# Altium PCB PCB_assembly_drawing_try2.PcbDoc (part 1 of 5)
Units mm, origin at the board's own origin, x right, y up, seen from the top; angles counter-clockwise.
Board outline 187.5 x 240 mm, 2 copper layers (Top Layer, Bottom Layer), stack 2.8 mm thick; 485 components, 419 nets, 1569 pads, 683 vias.
Unrouted connection lines stored in the file: 11.
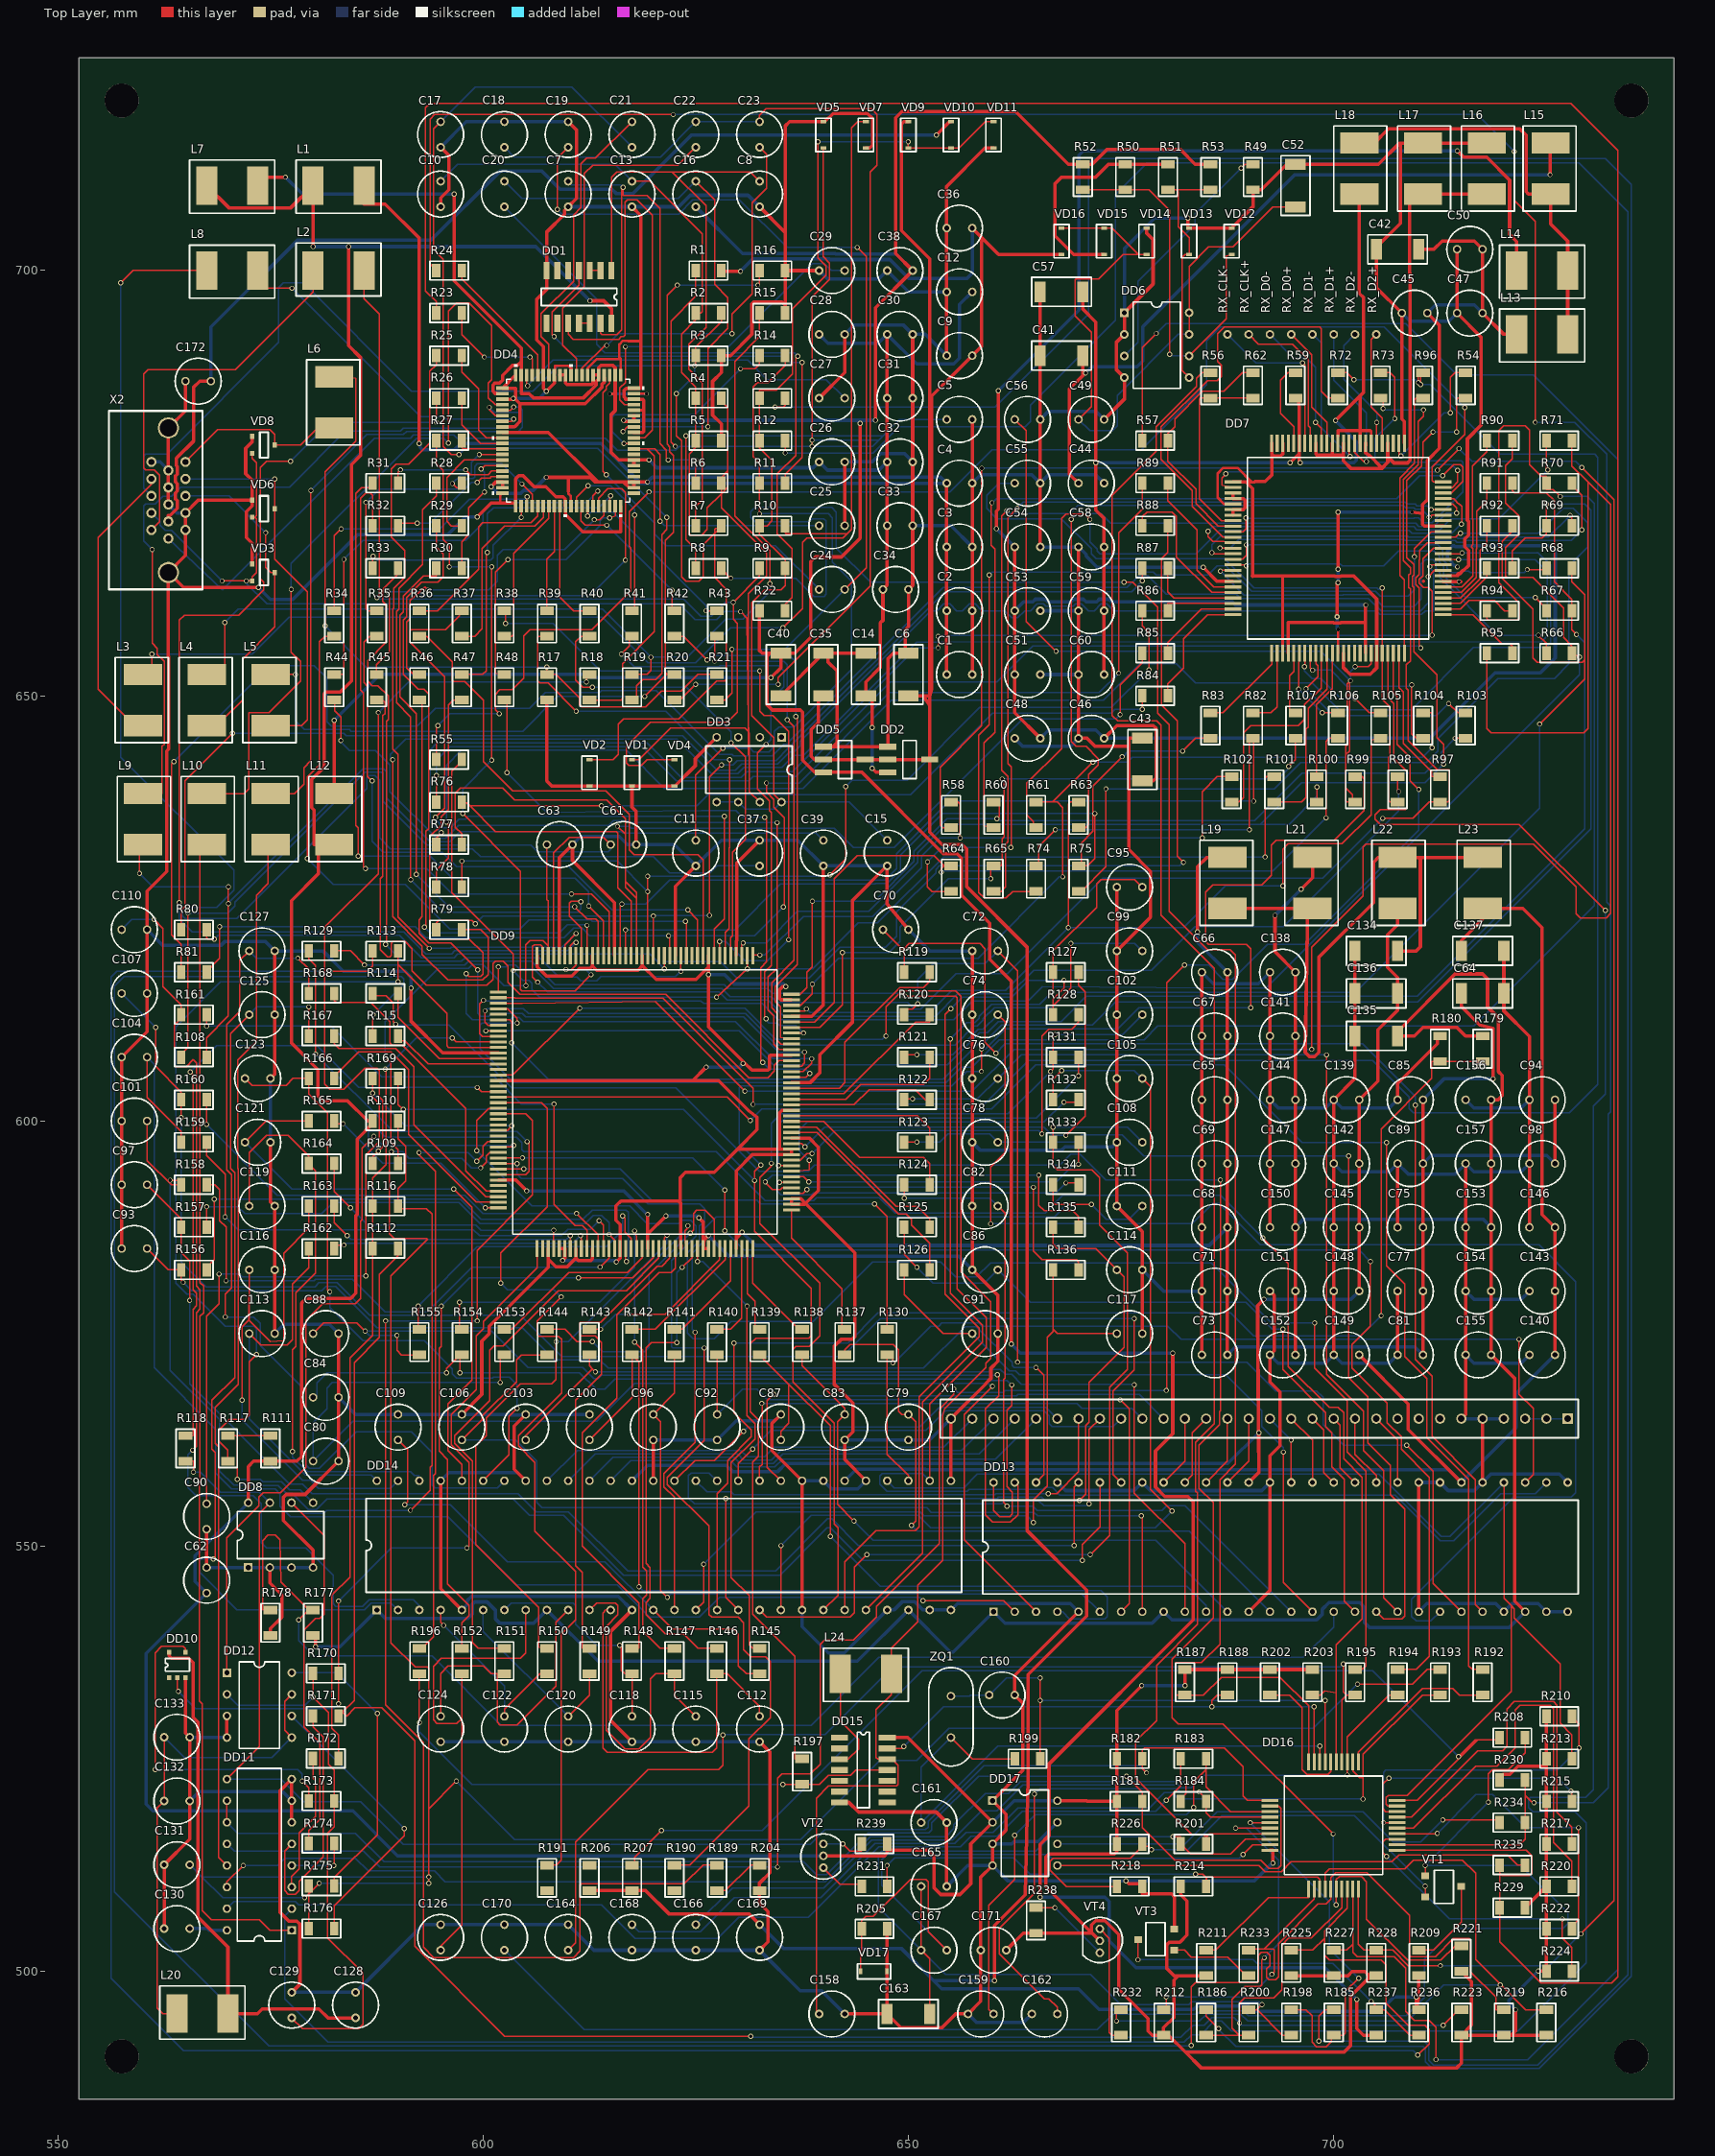
[diagram p0: Top Layer view]
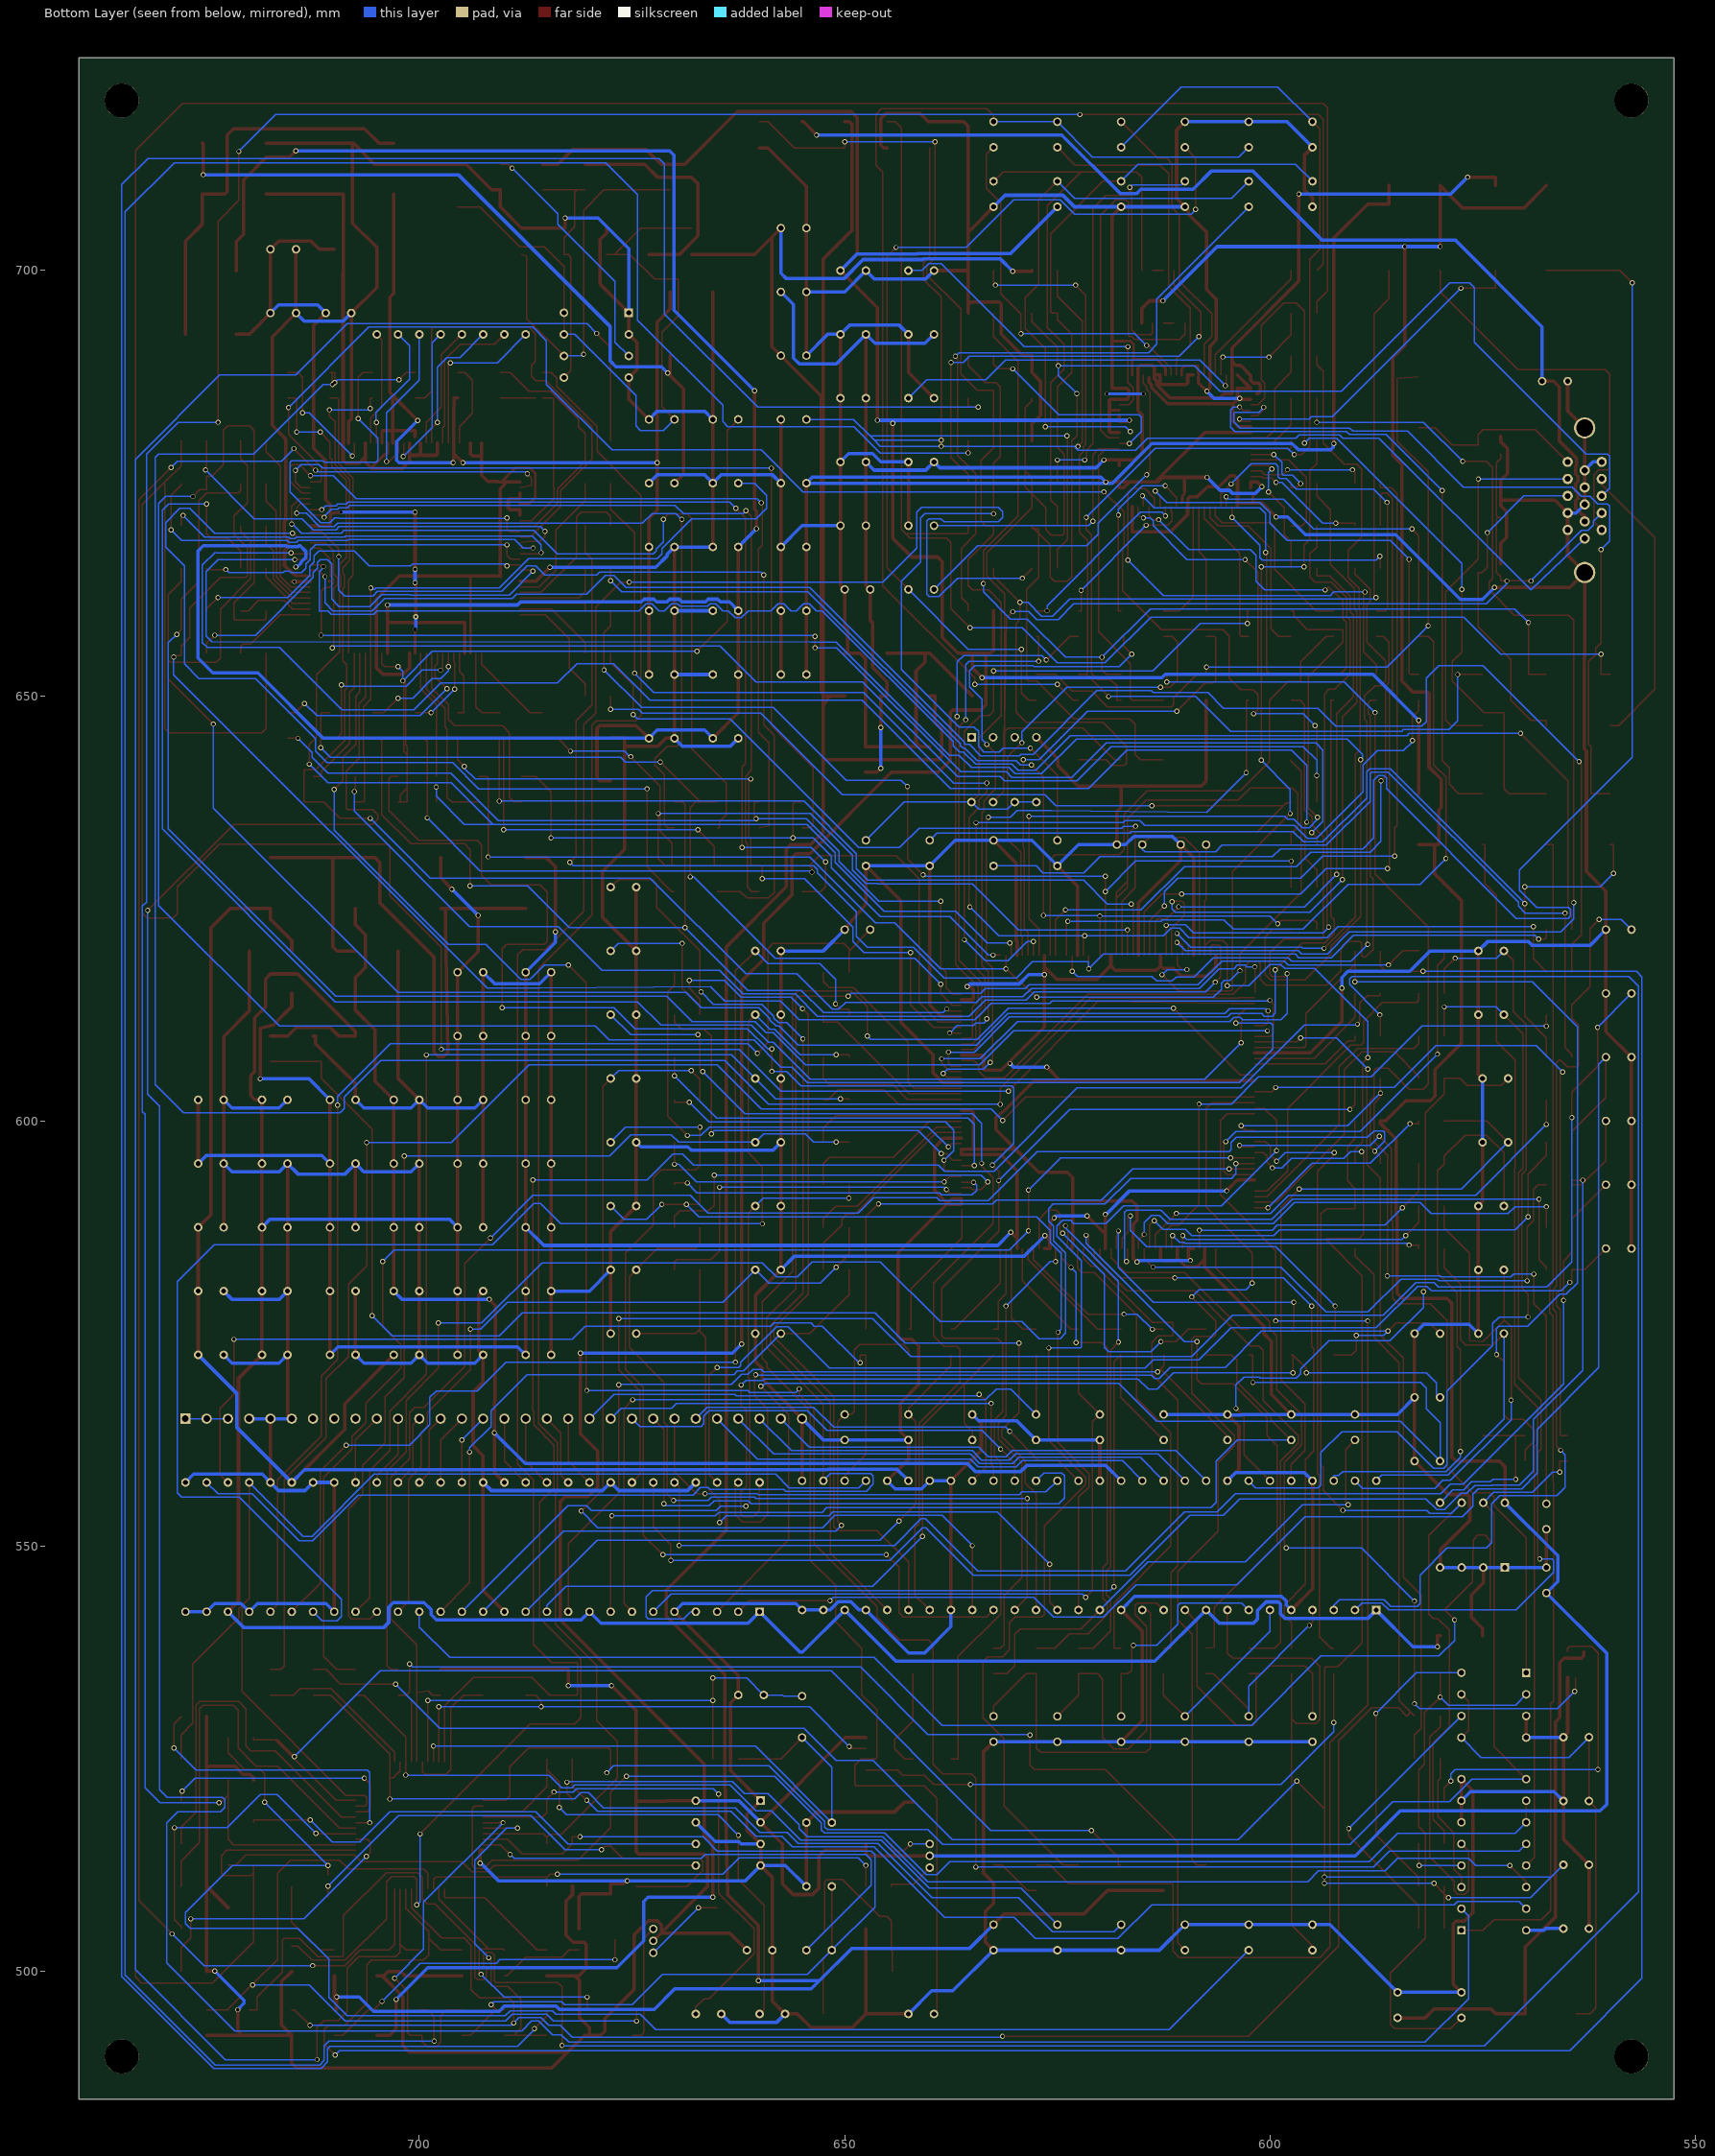
[diagram p1: Bottom Layer view, seen from below]

## Layer stack, top to bottom
Top Solder: solder mask 0.1, Solder Resist, Dk 3.5
Top Layer: signal copper 0.15
Dielectric 1: dielectric 2.5, FR-4, Dk 4.8
Bottom Layer: signal copper 0.15
Bottom Solder: solder mask 0.1, Solder Resist, Dk 3.5

## Board outline
552.5,485 740,485 740,725 552.5,725

## Design rules (kind name [scope] priority, off if disabled: settings)
Clearance [All] p1: gap=0.254 ignorepadtopadclearanceinfootprint=FALSE except(0: Arc-Hole Track-Hole SMDPad-Hole THPad-Hole Via-Hole Fill-Hole Poly-Hole Region-Hole Text-Hole; 0.2: Arc-SMDPad Track-SMDPad SMDPad-SMDPad)
PolygonConnect [All] p1: connectstyle=Relief reliefconductorwidth=0.254 reliefentries=4 polygonreliefangle="90 Angle" airgapwidth=0.254
RoutingVias [All] p1: holewidth=0.4 width=0.6 viastyle="Through Hole" minholewidth=0.3 minwidth=0.6 maxholewidth=0.5 maxwidth=1
SolderMaskExpansion [All] p1: expansion=0.102
Width signal [InNetClass('signal')] p1: maxlimit=0.25 minlimit=0.15 preferedwidth=0.15 minimp=50.000000 maximp=50.000000 favimp=50.000000
Width power [InNetClass('power')] p2: maxlimit=0.6 minlimit=0.3 preferedwidth=0.4 minimp=50.000000 maximp=50.000000 favimp=50.000000
30 further rules are at their usual default settings.

## Classes and differential pairs
net class signal: 12MHZ 9883_HS 9883_VS ADC1 ADC2 ASIC_H ASIC_RESET ASIC_SCL ASIC_SDA AUDIO_EN AUDIO_MUTE B_IN B_INA0 B_INA1 B_INA2 B_INA3 B_INA4 B_INA5 B_INA6 B_INA7 B_INB0 B_INB1 B_INB2 B_INB3 B_INB4 B_INB5 B_INB6 B_INB7 BA0 BA1 BA2 BA3 BA4 BA5 BA6 BA7 BB0 BB1 BB2 BB3 BB4 BB5 BB6 BB7 BL_ON_OFF COAST DE_IN FBLK FCLK1 G_IN G_INA0 G_INA1 G_INA2 G_INA3 G_INA4 G_INA5 G_INA6 G_INA7 G_INB0 G_INB1 G_INB2 G_INB3 G_INB4 G_INB5 G_INB6 G_INB7 GA0 GA1 GA2 GA3 GA4 GA5 GA6 GA7 GB0 GB1 GB2 GB3 GB4 GB5 GB6 GB7 HP_SENSE HSYNC_D HSYNC_IN HSYNC_X INPUT_SELECT LCD_CLK LCD_DE LCD_VCC LVDS_PD MCU_H_IN MCU_ISP_SCL MCU_ISP_SDA MCU_SCL1 MCU_SDA1 MCU_V_IN NetC7_1 NetC8_1 NetC11_1 NetC15_1 NetC16_1 NetC17_1 NetC18_1 NetC19_1 NetC20_2 NetC21_1 NetC22_1 NetC23_1 NetC24_1 NetC27_2 NetC29_2 NetC49_2 NetC55_2 NetC56_2 NetC61_2 NetC63_2 NetC90_2 NetC129_1 NetC132_1 NetC159_2 NetC160_1 NetC161_1 NetC162_2 NetC163_1 NetC164_1 NetC166_1 NetC167_1 NetC168_1 NetC170_1 NetDD1_2 NetDD1_4 NetDD1_11 NetDD4_2 NetDD4_3 NetDD4_4 NetDD4_5 NetDD4_6 NetDD4_7 NetDD4_8 NetDD4_9 NetDD4_12 NetDD4_13 NetDD4_14 NetDD4_15 NetDD4_16 NetDD4_17 NetDD4_18 NetDD4_19 NetDD4_56 NetDD4_57 NetDD4_64 NetDD4_65 NetDD4_66 NetDD4_67 NetDD4_70 NetDD4_71 NetDD4_72 NetDD4_73 NetDD4_74 NetDD4_75 NetDD4_76 NetDD4_77 NetDD6_3 NetDD6_5 NetDD6_6 NetDD7_8 NetDD7_9 NetDD7_10 NetDD7_11 NetDD7_12 NetDD7_13 NetDD7_14 NetDD7_15 NetDD7_16 NetDD7_17 NetDD7_20 NetDD7_21 NetDD7_22 NetDD7_23 NetDD7_24 NetDD7_25 NetDD7_26 NetDD7_27 NetDD7_30 NetDD7_31 NetDD7_32 NetDD7_33 NetDD7_34 NetDD7_35 NetDD7_36 NetDD7_37 NetDD7_49 NetDD7_50 NetDD7_51 NetDD7_52 NetDD7_53 NetDD7_54 NetDD7_55 NetDD7_56 NetDD7_59 NetDD7_60 NetDD7_61 NetDD7_62 NetDD7_63 NetDD7_64 NetDD7_65 NetDD7_66 NetDD7_69 NetDD7_70 NetDD7_71 NetDD7_72 NetDD7_73 NetDD7_74 NetDD7_75 NetDD7_77 NetDD7_80 NetDD7_81 NetDD7_85 NetDD7_86 NetDD7_90 NetDD7_91 NetDD7_93 NetDD7_94 NetDD7_96 NetDD8_5 NetDD9_11 NetDD9_13 NetDD9_14 NetDD9_19 NetDD9_33 NetDD9_34 NetDD9_37 NetDD9_38 NetDD9_39 NetDD9_40 NetDD9_44 NetDD9_47 NetDD9_49 NetDD9_50 NetDD9_52 NetDD9_53 NetDD9_54 NetDD9_55 NetDD9_57 NetDD9_58 NetDD9_59 NetDD9_60 NetDD9_62 NetDD9_63 NetDD9_64 NetDD9_65 NetDD9_66 NetDD9_68 NetDD9_69 NetDD9_70 NetDD9_73 NetDD9_74 NetDD9_75 NetDD9_76 NetDD9_78 NetDD9_79 NetDD9_80 NetDD9_81 NetDD9_84 NetDD9_85 NetDD9_86 NetDD9_87 NetDD9_88 NetDD9_89 NetDD9_90 NetDD9_93 NetDD9_95 NetDD9_96 NetDD9_97 NetDD9_98 NetDD9_100 NetDD9_101 NetDD9_102 NetDD9_103 NetDD10_4 NetDD11_3 NetDD11_4 NetDD11_5 NetDD12_6 NetDD12_8 NetDD13_17 NetDD13_37 NetDD13_38 NetDD13_39 NetDD13_40 NetDD13_41 NetDD13_42 NetDD13_45 NetDD13_46 NetDD13_47 NetDD13_48 NetDD14_17 NetDD14_37 NetDD14_38 NetDD14_39 NetDD14_40 NetDD14_41 NetDD14_42 NetDD14_45 NetDD14_46 NetDD14_47 NetDD14_48 NetDD15_3 NetDD15_11 NetDD15_13 NetDD16_1 NetDD16_6 NetDD16_15 NetDD16_16 NetDD16_23 NetDD16_24 NetDD16_40 NetDD16_42 NetDD16_43 NetDD16_44 NetDD17_5 NetDD17_6 NetL2_2 NetL3_2 NetL4_2 NetL5_2 NetL6_2 NetR209_2 NetR218_2 NetR231_2 NetR232_2 NetR233_2 NetR236_1 NetR238_1 NetR239_1 OSD_B OSD_CLK OSD_G OSD_HS OSD_R OSD_VS PD PDO POWER_ON_OFF PSC0 PSC1 R_IN R_INA0 R_INA1 R_INA2 R_INA3 R_INA4 R_INA5 R_INA6 R_INA7 R_INB0 R_INB1 R_INB2 R_INB3 R_INB4 R_INB5 R_INB6 R_INB7 RA0 RA1 RA2 RA3 RA4 RA5 RA6 RA7 RB0 RB1 RB2 RB3 RB4 RB5 RB6 RB7 ROM_SCL ROM_SCL_ASIC ROM_SCL_EEPROM ROM_SDA SCDT VCLK00 VCLK01 VGA_CON VGA_CONN VGA_HS VGA_SCL VGA_SDA VGA_VS VLCK00 VSYNC_D VSYNC_IN VSYNC_MCU
net class power: 3_3Va 3V3 3V3b 3V3LVDSA 3V3LVDSD 3V3LVDSP 3V3SD 5V_DDC 5V_STBY 5V_VGA 5Va 5Vb +3V3 A3_3V A3V3 D3_3V D3_V3 GND O3_3V P3_3V P3V3 PKA_GND
net class R_INB[0..7]: R_INB0 R_INB1 R_INB2 R_INB3 R_INB4 R_INB5 R_INB6 R_INB7
net class R_INA[0..7]: R_INA0 R_INA1 R_INA2 R_INA3 R_INA4 R_INA5 R_INA6 R_INA7
net class G_INB[0..7]: G_INB0 G_INB1 G_INB2 G_INB3 G_INB4 G_INB5 G_INB6 G_INB7
net class G_INA[0..7]: G_INA0 G_INA1 G_INA2 G_INA3 G_INA4 G_INA5 G_INA6 G_INA7
net class B_INB[0..7]: B_INB0 B_INB1 B_INB2 B_INB3 B_INB4 B_INB5 B_INB6 B_INB7
net class B_INA[0..7]: B_INA0 B_INA1 B_INA2 B_INA3 B_INA4 B_INA5 B_INA6 B_INA7
component class VGA: C172 X2
component class 36: C158 C159 C160 C161 C162 C163 C164 C165 C166 C167 C168 C169 C170 C171 DD15 DD16 DD17 L24 R181 R182 R183 R184 R185 R186 R187 R188 R189 R190 R191 R192 R193 R194 R195 R196 R197 R198 R199 R200 R201 R202 R203 R204 R205 R206 R207 R208 R209 R210 R211 R212 R213 R214 R215 R216 R217 R218 R219 R220 R221 R222 R223 R224 R225 R226 R227 R228 R229 R230 R231 R232 R233 R234 R235 R236 R237 R238 R239 VD17 VT1 VT2 VT3 VT4 ZQ1
component class 35: C134 C135 C136 C137 C138 C139 C140 C141 C142 C143 C144 C145 C146 C147 C148 C149 C150 C151 C152 C153 C154 C155 C156 C157 DD13 DD14 L21 L22 L23 R177 R178 R179 R180 X1
component class 34: C128 C129 C130 C131 C132 C133 DD10 DD11 DD12 L20 R170 R171 R172 R173 R174 R175 R176
component class 33: C61 C62 C63 C64 C65 C66 C67 C68 C69 C70 C71 C72 C73 C74 C75 C76 C77 C78 C79 C80 C81 C82 C83 C84 C85 C86 C87 C88 C89 C90 C91 C92 C93 C94 C95 C96 C97 C98 C99 C100 C101 C102 C103 C104 C105 C106 C107 C108 C109 C110 C111 C112 C113 C114 C115 C116 C117 C118 C119 C120 C121 C122 C123 C124 C125 C126 C127 DD8 DD9 L19 R108 R109 R110 R111 R112 R113 R114 R115 R116 R117 R118 R119 R120 R121 R122 R123 R124 R125 R126 R127 R128 R129 R130 R131 R132 R133 R134 R135 R136 R137 R138 R139 R140 R141 R142 R143 R144 R145 R146 R147 R148 R149 R150 R151 R152 R153 R154 R155 R156 R157 R158 R159 R160 R161 R162 R163 R164 R165 R166 R167 R168 R169
component class 32: C41 C42 C43 C44 C45 C46 C47 C48 C49 C50 C51 C52 C53 C54 C55 C56 C57 C58 C59 C60 DD6 DD7 L13 L14 L15 L16 L17 L18 R49 R50 R51 R52 R53 R54 R55 R56 R57 R58 R59 R60 R61 R62 R63 R64 R65 R66 R67 R68 R69 R70 R71 R72 R73 R74 R75 R76 R77 R78 R79 R80 R81 R82 R83 R84 R85 R86 R87 R88 R89 R90 R91 R92 R93 R94 R95 R96 R97 R98 R99 R100 R101 R102 R103 R104 R105 R106 R107 RX_CLK+ RX_CLK- RX_D0+ RX_D0- RX_D1+ RX_D1- RX_D2+ RX_D2- VD12 VD13 VD14 VD15 VD16
component class 31: C1 C2 C3 C4 C5 C6 C7 C8 C9 C10 C11 C12 C13 C14 C15 C16 C17 C18 C19 C20 C21 C22 C23 C24 C25 C26 C27 C28 C29 C30 C31 C32 C33 C34 C35 C36 C37 C38 C39 C40 DD1 DD2 DD3 DD4 DD5 L1 L2 L3 L4 L5 L6 L7 L8 L9 L10 L11 L12 R1 R2 R3 R4 R5 R6 R7 R8 R9 R10 R11 R12 R13 R14 R15 R16 R17 R18 R19 R20 R21 R22 R23 R24 R25 R26 R27 R28 R29 R30 R31 R32 R33 R34 R35 R36 R37 R38 R39 R40 R41 R42 R43 R44 R45 R46 R47 R48 VD1 VD2 VD3 VD4 VD5 VD6 VD7 VD8 VD9 VD10 VD11

## Components (designator, comment, footprint, x,y, rotation, side; value= is the part's Value field where it differs from the comment)
C1 "Capacitor" cap_electro_13 656,652.5 r0 top
C2 "Capacitor" cap_electro_13 656,660 r0 top
C3 "Capacitor" cap_electro_13 656,667.5 r0 top
C4 "Capacitor" cap_electro_13 656,675 r0 top
C5 "Capacitor" cap_electro_13 656,682.5 r0 top
C6 "TuningCapacitor" Cap_tantal_D 650,652.5 r270 top
C7 "Capacitor" cap_electro_13 610,709 r270 top
C8 "Capacitor" cap_electro_13 632.5,709 r270 top
C9 "Capacitor" cap_electro_13 656,690 r180 top
C10 "Capacitor" cap_electro_13 595,709 r270 top
C11 "Capacitor" cap_electro_13 625,631.5 r270 top
C12 "Capacitor" cap_electro_13 656,697.5 r180 top
C13 "Capacitor" cap_electro_13 617.5,709 r270 top
C14 "TuningCapacitor" Cap_tantal_D 645,652.5 r270 top
C15 "Capacitor" cap_electro_13 647.5,631.5 r270 top
C16 "Capacitor" cap_electro_13 625,709 r270 top
C17 "Capacitor" cap_electro_13 595,716 r270 top
C18 "Capacitor" cap_electro_13 602.5,716 r90 top
C19 "Capacitor" cap_electro_13 610,716 r90 top
C20 "Capacitor" cap_electro_13 602.5,709 r270 top
C21 "Capacitor" cap_electro_13 617.5,716 r270 top
C22 "Capacitor" cap_electro_13 625,716 r90 top
C23 "Capacitor" cap_electro_13 632.5,716 r90 top
C24 "Capacitor" cap_electro_13 641,662.5 r0 top
C25 "Capacitor" cap_electro_13 641,670 r180 top
C26 "Capacitor" cap_electro_13 641,677.5 r0 top
C27 "Capacitor" cap_electro_13 641,685 r0 top
C28 "Capacitor" cap_electro_13 641,692.5 r0 top
C29 "Capacitor" cap_electro_13 641,700 r0 top
C30 "Capacitor" cap_electro_13 649,692.5 r0 top
C31 "Capacitor" cap_electro_13 649,685 r0 top
C32 "Capacitor" cap_electro_13 649,677.5 r0 top
C33 "Capacitor" cap_electro_13 649,670 r0 top
C34 "Capacitor" cap_electro_13 648.5,662.5 r0 top
C35 "TuningCapacitor" Cap_tantal_D 640,652.5 r270 top
C36 "Capacitor" cap_electro_13 656,705 r180 top
C37 "Capacitor" cap_electro_13 632.5,631.5 r90 top
C38 "Capacitor" cap_electro_13 649,700 r180 top
C39 "Capacitor" cap_electro_13 640,631.5 r270 top
C40 "TuningCapacitor" Cap_tantal_D 635,652.5 r90 top
C41 "TuningCapacitor" Cap_tantal_D 668,690 r0 top
C42 "TuningCapacitor" Cap_tantal_D 707.5,702.5 r0 top
C43 "TuningCapacitor" Cap_tantal_D 677.5,642.5 r270 top
C44 "Capacitor" cap_electro_13 671.5,675 r180 top
C45 "Capacitor" cap_electro_13 709.5,695 r0 top
C46 "Capacitor" cap_electro_13 671.5,645 r0 top
C47 "Capacitor" cap_electro_13 716,695 r0 top
C48 "Capacitor" cap_electro_13 664,645 r0 top
C49 "Capacitor" cap_electro_13 671.5,682.5 r180 top
C50 "Capacitor" cap_electro_13 716,702.5 r0 top
C51 "Capacitor" cap_electro_13 664,652.5 r180 top
C52 "TuningCapacitor" Cap_tantal_D 695.5,710 r270 top
C53 "Capacitor" cap_electro_13 664,660 r180 top
C54 "Capacitor" cap_electro_13 664,667.5 r180 top
C55 "Capacitor" cap_electro_13 664,675 r180 top
C56 "Capacitor" cap_electro_13 664,682.5 r180 top
C57 "TuningCapacitor" Cap_tantal_D 668,697.5 r0 top
C58 "Capacitor" cap_electro_13 671.5,667.5 r0 top
C59 "Capacitor" cap_electro_13 671.5,660 r0 top
C60 "Capacitor" cap_electro_13 671.5,652.5 r0 top
C61 "Capacitor" cap_electro_13 616.5,632.5 r180 top
C62 "Capacitor" cap_electro_13 567.5,546 r270 top
C63 "Capacitor" cap_electro_13 609,632.5 r180 top
C64 "TuningCapacitor" Cap_tantal_D 717.5,615 r180 top
C65 "Capacitor" cap_electro_13 686,602.5 r0 top
C66 "Capacitor" cap_electro_13 686,617.5 r0 top
C67 "Capacitor" cap_electro_13 686,610 r0 top
C68 "Capacitor" cap_electro_13 686,587.5 r0 top
C69 "Capacitor" cap_electro_13 686,595 r0 top
C70 "Capacitor" cap_electro_13 648.5,622.5 r180 top
C71 "Capacitor" cap_electro_13 686,580 r0 top
C72 "Capacitor" cap_electro_13 659,620 r0 top
C73 "Capacitor" cap_electro_13 686,572.5 r0 top
C74 "Capacitor" cap_electro_13 659,612.5 r0 top
C75 "Capacitor" cap_electro_13 709,587.5 r0 top
C76 "Capacitor" cap_electro_13 659,605 r0 top
C77 "Capacitor" cap_electro_13 709,580 r0 top
C78 "Capacitor" cap_electro_13 659,597.5 r0 top
C79 "Capacitor" cap_electro_13 650,564 r90 top
C80 "Capacitor" cap_electro_13 581.5,560 r180 top
C81 "Capacitor" cap_electro_13 709,572.5 r0 top
C82 "Capacitor" cap_electro_13 659,590 r0 top
C83 "Capacitor" cap_electro_13 642.5,564 r90 top
C84 "Capacitor" cap_electro_13 581.5,567.5 r180 top
C85 "Capacitor" cap_electro_13 709,602.5 r0 top
C86 "Capacitor" cap_electro_13 659,582.5 r0 top
C87 "Capacitor" cap_electro_13 635,564 r270 top
C88 "Capacitor" cap_electro_13 581.5,575 r180 top
C89 "Capacitor" cap_electro_13 709,595 r0 top
C90 "Capacitor" cap_electro_13 567.5,553.5 r90 top
C91 "Capacitor" cap_electro_13 659,575 r180 top
C92 "Capacitor" cap_electro_13 627.5,564 r90 top
C93 "Capacitor" cap_electro_13 559,585 r0 top
C94 "Capacitor" cap_electro_13 724.5,602.5 r0 top
C95 "Capacitor" cap_electro_13 676,627.5 r0 top
C96 "Capacitor" cap_electro_13 620,564 r90 top
C97 "Capacitor" cap_electro_13 559,592.5 r0 top
C98 "Capacitor" cap_electro_13 724.5,595 r0 top
C99 "Capacitor" cap_electro_13 676,620 r0 top
C100 "Capacitor" cap_electro_13 612.5,564 r270 top
C101 "Capacitor" cap_electro_13 559,600 r0 top
C102 "Capacitor" cap_electro_13 676,612.5 r0 top
C103 "Capacitor" cap_electro_13 605,564 r270 top
C104 "Capacitor" cap_electro_13 559,607.5 r0 top
C105 "Capacitor" cap_electro_13 676,605 r0 top
C106 "Capacitor" cap_electro_13 597.5,564 r270 top
C107 "Capacitor" cap_electro_13 559,615 r180 top
C108 "Capacitor" cap_electro_13 676,597.5 r0 top
C109 "Capacitor" cap_electro_13 590,564 r270 top
C110 "Capacitor" cap_electro_13 559,622.5 r180 top
C111 "Capacitor" cap_electro_13 676,590 r0 top
C112 "Capacitor" cap_electro_13 632.5,528.5 r90 top
C113 "Capacitor" cap_electro_13 574,575 r180 top
C114 "Capacitor" cap_electro_13 676,582.5 r180 top
C115 "Capacitor" cap_electro_13 625,528.5 r90 top
C116 "Capacitor" cap_electro_13 574,582.5 r180 top
C117 "Capacitor" cap_electro_13 676,575 r180 top
C118 "Capacitor" cap_electro_13 617.5,528.5 r90 top
C119 "Capacitor" cap_electro_13 574,590 r180 top
C120 "Capacitor" cap_electro_13 610,528.5 r90 top
C121 "Capacitor" cap_electro_13 573.5,597.5 r180 top
C122 "Capacitor" cap_electro_13 602.5,528.5 r90 top
C123 "Capacitor" cap_electro_13 573.5,605 r180 top
C124 "Capacitor" cap_electro_13 595,528.5 r90 top
C125 "Capacitor" cap_electro_13 574,612.5 r180 top
C126 "Capacitor" cap_electro_13 595,504 r270 top
C127 "Capacitor" cap_electro_13 574,620 r180 top
C128 "Capacitor" cap_electro_13 585,496.04 r90 top
C129 "Capacitor" cap_electro_13 577.5,496.04 r90 top
C130 "Capacitor" cap_electro_13 564,505.04 r0 top
C131 "Capacitor" cap_electro_13 564,512.54 r180 top
C132 "Capacitor" cap_electro_13 564,520.04 r0 top
C133 "Capacitor" cap_electro_13 564,527.54 r0 top
C134 "TuningCapacitor" Cap_tantal_D 705,620 r0 top
C135 "TuningCapacitor" Cap_tantal_D 705,610 r0 top
C136 "TuningCapacitor" Cap_tantal_D 705,615 r0 top
C137 "TuningCapacitor" Cap_tantal_D 717.5,620 r180 top
C138 "Capacitor" cap_electro_13 694,617.5 r0 top
C139 "Capacitor" cap_electro_13 701.5,602.5 r0 top
C140 "Capacitor" cap_electro_13 724.5,572.5 r0 top
C141 "Capacitor" cap_electro_13 694,610 r0 top
C142 "Capacitor" cap_electro_13 701.5,595 r0 top
C143 "Capacitor" cap_electro_13 724.5,580 r0 top
C144 "Capacitor" cap_electro_13 694,602.5 r0 top
C145 "Capacitor" cap_electro_13 701.5,587.5 r0 top
C146 "Capacitor" cap_electro_13 724.5,587.5 r0 top
C147 "Capacitor" cap_electro_13 694,595 r0 top
C148 "Capacitor" cap_electro_13 701.5,580 r0 top
C149 "Capacitor" cap_electro_13 701.5,572.5 r0 top
C150 "Capacitor" cap_electro_13 694,587.5 r0 top
C151 "Capacitor" cap_electro_13 694,580 r0 top
C152 "Capacitor" cap_electro_13 694,572.5 r0 top
C153 "Capacitor" cap_electro_13 717,587.5 r0 top
C154 "Capacitor" cap_electro_13 717,580 r0 top
C155 "Capacitor" cap_electro_13 717,572.5 r0 top
C156 "Capacitor" cap_electro_13 717,602.5 r0 top
C157 "Capacitor" cap_electro_13 717,595 r0 top
C158 "Capacitor" cap_electro_13 641,495 r0 top
C159 "Capacitor" cap_electro_13 658.5,495 r0 top
C160 "Capacitor" cap_electro_13 661,532.5 r0 top
C161 "Capacitor" cap_electro_13 653,517.5 r0 top
C162 "Capacitor" cap_electro_13 666,495 r0 top
C163 "TuningCapacitor" Cap_tantal_D 650,495 r0 top
C164 "Capacitor" cap_electro_13 610,504 r90 top
C165 "Capacitor" cap_electro_13 653,510 r180 top
C166 "Capacitor" cap_electro_13 625,504 r270 top
C167 "Capacitor" cap_electro_13 653,502.5 r180 top
C168 "Capacitor" cap_electro_13 617.5,504 r270 top
C169 "Capacitor" cap_electro_13 632.5,504 r270 top
C170 "Capacitor" cap_electro_13 602.5,504 r90 top
C171 "Capacitor" cap_electro_13 660,502.5 r180 top
C172 "Capacitor" cap_electro_13 566.5,687 r0 top
DD1 "74LVX14" 74LVX14(SO-14) 615.08,699.915 r270 top
DD2 "AIC1732" AIC1732(SOT-89) 650.25,642.5 r0 top
DD3 "24C21" 24Cxx 635.08,645.12 r270 top
DD4 "AD9883ABSTZ-140" ST_80_2_ADI 610,680 r90 top
DD5 "AIC1732" AIC1732(SOT-89) 642.675,642.5 r0 top
DD6 "24C02" 24Cxx 675.38,695.04 r0 top
DD7 "SIL151" SIL151 688.15,675.15 r180 top
DD8 "24LC08" 24Cxx 572.38,547.5 r90 top
DD9 "SD1210" SD1210 601.8,615.15 r0 top
DD10 "F14-SINGLE" 74AHC1G14(SOT25) 563.1,534.54 r90 top
DD11 "74LV4053" 74LV4053(SOT38-4) 577.5,504.84 r180 top
DD12 "AV9173-01" AV9173-01(DIP8) 569.88,535.12 r0 top
DD13 "SN75LVDS83" SN75LVDS83_v2 660,542.3 r90 top
DD14 "SN75LVDS83" SN75LVDS83_v2 587.5,542.5 r90 top
DD15 "74LCX125" 74LCX125(page12) 641.9,527.5 r0 top
DD16 "SM0230" SM0230 702.9,523.9 r90 top
DD17 "24LC16" 24Cxx 659.88,520.08 r0 top
L1 "Inductor" inductor 583,710 r180 top
L2 "Inductor" inductor 583,700 r0 top
L3 "Inductor" inductor 560,649.5 r90 top
L4 "Inductor" inductor 567.5,649.5 r90 top
L5 "Inductor" inductor 575,649.5 r90 top
L6 "Inductor" inductor 582.5,684.5 r90 top
L7 "Inductor" inductor 570.5,710 r180 top
L8 "Inductor" inductor 570.5,700 r180 top
L9 "Inductor" inductor 560,635.5 r270 top
L10 "Inductor" inductor 567.5,635.5 r270 top
L11 "Inductor" inductor 575,635.5 r270 top
L12 "Inductor" inductor 582.5,635.5 r270 top
L13 "Inductor" inductor 724.5,692.5 r180 top
L14 "Inductor" inductor 724.5,700 r180 top
L15 "Inductor" inductor 725.5,712 r90 top
L16 "Inductor" inductor 718,712 r270 top
L17 "Inductor" inductor 710.5,712 r270 top
L18 "Inductor" inductor 703,712 r270 top
L19 "Inductor" inductor 687.5,628 r90 top
L20 "Inductor" inductor 567,495.04 r0 top
L21 "Inductor" inductor 697.5,628 r90 top
L22 "Inductor" inductor 707.5,628 r270 top
L23 "Inductor" inductor 717.5,628 r270 top
L24 "Inductor" inductor 645,535 r180 top
R1 "Resistor" R_1206 626.5,700 r0 top
R2 "Resistor" R_1206 626.5,695 r180 top
R3 "Resistor" R_1206 626.5,690 r180 top
R4 "Resistor" R_1206 626.5,685 r180 top
R5 "Resistor" R_1206 626.5,680 r180 top
R6 "Resistor" R_1206 626.5,675 r180 top
R7 "Resistor" R_1206 626.5,670 r180 top
R8 "Resistor" R_1206 626.5,665 r0 top
R9 "Resistor" R_1206 634,665 r0 top
R10 "Resistor" R_1206 634,670 r180 top
R11 "Resistor" R_1206 634,675 r180 top
R12 "Resistor" R_1206 634,680 r180 top
R13 "Resistor" R_1206 634,685 r180 top
R14 "Resistor" R_1206 634,690 r180 top
R15 "Resistor" R_1206 634,695 r180 top
R16 "Resistor" R_1206 634,700 r180 top
R17 "Resistor" R_1206 607.5,651 r90 top
R18 "Resistor" R_1206 612.5,651 r270 top
R19 "Resistor" R_1206 617.5,651 r270 top
R20 "Resistor" R_1206 622.5,651 r270 top
R21 "Resistor" R_1206 627.5,651 r270 top
R22 "Resistor" R_1206 634,660 r0 top
R23 "Resistor" R_1206 596,695 r0 top
R24 "Resistor" R_1206 596,700 r0 top
R25 "Resistor" R_1206 596,690 r180 top
R26 "Resistor" R_1206 596,685 r180 top
R27 "Resistor" R_1206 596,680 r180 top
R28 "Resistor" R_1206 596,675 r180 top
R29 "Resistor" R_1206 596,670 r180 top
R30 "Resistor" R_1206 596,665 r180 top
R31 "Resistor" R_1206 588.5,675 r180 top
R32 "Resistor" R_1206 588.5,670 r180 top
R33 "Resistor" R_1206 588.5,665 r0 top
R34 "Resistor" R_1206 582.5,658.5 r270 top
R35 "Resistor" R_1206 587.5,658.5 r270 top
R36 "Resistor" R_1206 592.5,658.5 r270 top
R37 "Resistor" R_1206 597.5,658.5 r90 top
R38 "Resistor" R_1206 602.5,658.5 r90 top
R39 "Resistor" R_1206 607.5,658.5 r270 top
R40 "Resistor" R_1206 612.5,658.5 r270 top
R41 "Resistor" R_1206 617.5,658.5 r270 top
R42 "Resistor" R_1206 622.5,658.5 r270 top
R43 "Resistor" R_1206 627.5,658.5 r270 top
R44 "Resistor" R_1206 582.5,651 r270 top
R45 "Resistor" R_1206 587.5,651 r270 top
R46 "Resistor" R_1206 592.5,651 r270 top
R47 "Resistor" R_1206 597.5,651 r270 top
R48 "Resistor" R_1206 602.5,651 r270 top
R49 "Resistor" R_1206 690.5,711 r90 top
R50 "Resistor" R_1206 675.5,711 r90 top
R51 "Resistor" R_1206 680.5,711 r90 top
R52 "Resistor" R_1206 670.5,711 r270 top
R53 "Resistor" R_1206 685.5,711 r270 top
R54 "Resistor" R_1206 715.5,686.5 r270 top
R55 "Resistor" R_1206 596,642.5 r0 top
R56 "Resistor" R_1206 685.5,686.5 r90 top
R57 "Resistor" R_1206 679,680 r180 top
R58 "Resistor" R_1206 655,636 r90 top
R59 "Resistor" R_1206 695.5,686.5 r90 top
R60 "Resistor" R_1206 660,636 r90 top
R61 "Resistor" R_1206 665,636 r90 top
R62 "Resistor" R_1206 690.5,686.5 r270 top
R63 "Resistor" R_1206 670,636 r90 top
R64 "Resistor" R_1206 655,628.5 r90 top
R65 "Resistor" R_1206 660,628.5 r90 top
R66 "Resistor" R_1206 726.5,655 r0 top
R67 "Resistor" R_1206 726.5,660 r0 top
R68 "Resistor" R_1206 726.5,665 r0 top
R69 "Resistor" R_1206 726.5,670 r180 top
R70 "Resistor" R_1206 726.5,675 r180 top
R71 "Resistor" R_1206 726.5,680 r0 top
R72 "Resistor" R_1206 700.5,686.5 r90 top
R73 "Resistor" R_1206 705.5,686.5 r270 top
R74 "Resistor" R_1206 665,628.5 r90 top
R75 "Resistor" R_1206 670,628.5 r90 top
R76 "Resistor" R_1206 596,637.5 r0 top
R77 "Resistor" R_1206 596,632.5 r0 top
R78 "Resistor" R_1206 596,627.5 r0 top
R79 "Resistor" R_1206 596,622.5 r180 top
R80 "Resistor" R_1206 566,622.5 r0 top
R81 "Resistor" R_1206 566,617.5 r0 top
R82 "Resistor" R_1206 690.5,646.5 r270 top
R83 "Resistor" R_1206 685.5,646.5 r270 top
R84 "Resistor" R_1206 679,650 r180 top
R85 "Resistor" R_1206 679,655 r180 top
R86 "Resistor" R_1206 679,660 r180 top
R87 "Resistor" R_1206 679,665 r180 top
R88 "Resistor" R_1206 679,670 r0 top
R89 "Resistor" R_1206 679,675 r180 top
R90 "Resistor" R_1206 719.5,680 r0 top
R91 "Resistor" R_1206 719.5,675 r0 top
R92 "Resistor" R_1206 719.5,670 r0 top
R93 "Resistor" R_1206 719.5,665 r0 top
R94 "Resistor" R_1206 719.5,660 r180 top
R95 "Resistor" R_1206 719.5,655 r180 top
R96 "Resistor" R_1206 710.5,686.5 r90 top
R97 "Resistor" R_1206 712.5,639 r270 top
R98 "Resistor" R_1206 707.5,639 r90 top
R99 "Resistor" R_1206 702.5,639 r90 top
R100 "Resistor" R_1206 698,639 r270 top
R101 "Resistor" R_1206 693,639 r90 top
R102 "Resistor" R_1206 688,639 r90 top
R103 "Resistor" R_1206 715.5,646.5 r270 top
R104 "Resistor" R_1206 710.5,646.5 r90 top
R105 "Resistor" R_1206 705.5,646.5 r270 top
R106 "Resistor" R_1206 700.5,646.5 r270 top
R107 "Resistor" R_1206 695.5,646.5 r270 top
R108 "Resistor" R_1206 566,607.5 r0 top
R109 "Resistor" R_1206 588.5,595 r180 top
R110 "Resistor" R_1206 588.5,600 r0 top
R111 "Resistor" R_1206 575,561.5 r90 top
R112 "Resistor" R_1206 588.5,585 r0 top
R113 "Resistor" R_1206 588.5,620 r180 top
R114 "Resistor" R_1206 588.5,615 r180 top
R115 "Resistor" R_1206 588.5,610 r180 top
R116 "Resistor" R_1206 588.5,590 r0 top
R117 "Resistor" R_1206 570,561.5 r90 top
R118 "Resistor" R_1206 565,561.5 r270 top
R119 "Resistor" R_1206 651,617.5 r0 top
R120 "Resistor" R_1206 651,612.5 r0 top
R121 "Resistor" R_1206 651,607.5 r0 top
R122 "Resistor" R_1206 651,602.5 r0 top
R123 "Resistor" R_1206 651,597.5 r0 top
R124 "Resistor" R_1206 651,592.5 r0 top
R125 "Resistor" R_1206 651,587.5 r0 top
R126 "Resistor" R_1206 651,582.5 r0 top
R127 "Resistor" R_1206 668.5,617.5 r0 top
R128 "Resistor" R_1206 668.5,612.5 r0 top
R129 "Resistor" R_1206 581,620 r180 top
R130 "Resistor" R_1206 647.5,574 r90 top
R131 "Resistor" R_1206 668.5,607.5 r0 top
R132 "Resistor" R_1206 668.5,602.5 r0 top
R133 "Resistor" R_1206 668.5,597.5 r0 top
R134 "Resistor" R_1206 668.5,592.5 r0 top
R135 "Resistor" R_1206 668.5,587.5 r0 top
R136 "Resistor" R_1206 668.5,582.5 r0 top
R137 "Resistor" R_1206 642.5,574 r90 top
R138 "Resistor" R_1206 637.5,574 r90 top
R139 "Resistor" R_1206 632.5,574 r90 top
R140 "Resistor" R_1206 627.5,574 r90 top
R141 "Resistor" R_1206 622.5,574 r90 top
R142 "Resistor" R_1206 617.5,574 r90 top
R143 "Resistor" R_1206 612.5,574 r90 top
R144 "Resistor" R_1206 607.5,574 r90 top
R145 "Resistor" R_1206 632.5,536.5 r90 top
R146 "Resistor" R_1206 627.5,536.5 r90 top
R147 "Resistor" R_1206 622.5,536.5 r90 top
R148 "Resistor" R_1206 617.5,536.5 r90 top
R149 "Resistor" R_1206 612.5,536.5 r90 top
R150 "Resistor" R_1206 607.5,536.5 r90 top
R151 "Resistor" R_1206 602.5,536.5 r90 top
R152 "Resistor" R_1206 597.5,536.5 r90 top
R153 "Resistor" R_1206 602.5,574 r90 top
R154 "Resistor" R_1206 597.5,574 r90 top
R155 "Resistor" R_1206 592.5,574 r90 top
R156 "Resistor" R_1206 566,582.5 r0 top
R157 "Resistor" R_1206 566,587.5 r0 top
R158 "Resistor" R_1206 566,592.5 r0 top
R159 "Resistor" R_1206 566,597.5 r0 top
R160 "Resistor" R_1206 566,602.5 r0 top
R161 "Resistor" R_1206 566,612.5 r0 top
R162 "Resistor" R_1206 581,585 r0 top
R163 "Resistor" R_1206 581,590 r0 top
R164 "Resistor" R_1206 581,595 r0 top
R165 "Resistor" R_1206 581,600 r0 top
R166 "Resistor" R_1206 581,605 r0 top
R167 "Resistor" R_1206 581,610 r0 top
R168 "Resistor" R_1206 581,615 r0 top
R169 "Resistor" R_1206 588.5,605 r180 top
R170 "Resistor" R_1206 581.5,535.04 r180 top
R171 "Resistor" R_1206 581.5,530.04 r180 top
R172 "Resistor" R_1206 581.5,525.04 r180 top
R173 "Resistor" R_1206 581,520.04 r0 top
R174 "Resistor" R_1206 581,515.04 r180 top
R175 "Resistor" R_1206 581,510.04 r180 top
R176 "Resistor" R_1206 581,505.04 r180 top
R177 "Resistor" R_1206 580,541 r270 top
R178 "Resistor" R_1206 575,541 r90 top
R179 "Resistor" R_1206 717.5,608.5 r90 top
R180 "Resistor" R_1206 712.5,608.5 r270 top
R181 "Resistor" R_1206 676,520 r180 top
R182 "Resistor" R_1206 676,525 r180 top
R183 "Resistor" R_1206 683.5,525 r0 top
R184 "Resistor" R_1206 683.5,520 r0 top
R185 "Resistor" R_1206 700,494 r270 top
R186 "Resistor" R_1206 685,494 r270 top
R187 "Resistor" R_1206 682.5,534 r90 top
R188 "Resistor" R_1206 687.5,534 r90 top
R189 "Resistor" R_1206 627.5,511 r90 top
R190 "Resistor" R_1206 622.5,511 r90 top
R191 "Resistor" R_1206 607.5,511 r90 top
R192 "Resistor" R_1206 717.5,534 r90 top
R193 "Resistor" R_1206 712.5,534 r90 top
R194 "Resistor" R_1206 707.5,534 r90 top
R195 "Resistor" R_1206 702.5,534 r90 top
R196 "Resistor" R_1206 592.5,536.5 r90 top
R197 "Resistor" R_1206 637.5,523.5 r90 top
R198 "Resistor" R_1206 695,494 r90 top
R199 "Resistor" R_1206 664,525 r0 top
R200 "Resistor" R_1206 690,494 r270 top
R201 "Resistor" R_1206 683.5,515 r0 top
R202 "Resistor" R_1206 692.5,534 r90 top
R203 "Resistor" R_1206 697.5,534 r90 top
R204 "Resistor" R_1206 632.5,511 r90 top
R205 "Resistor" R_1206 646,505 r180 top
R206 "Resistor" R_1206 612.5,511 r90 top
R207 "Resistor" R_1206 617.5,511 r90 top
R208 "Resistor" R_1206 721,527.5 r0 top
R209 "Resistor" R_1206 710,501 r90 top
R210 "Resistor" R_1206 726.5,530 r0 top
R211 "Resistor" R_1206 685,501 r90 top
R212 "Resistor" R_1206 680,494 r90 top
R213 "Resistor" R_1206 726.5,525 r0 top
R214 "Resistor" R_1206 683.5,510 r0 top
R215 "Resistor" R_1206 726.5,520 r0 top
R216 "Resistor" R_1206 725,494 r90 top
R217 "Resistor" R_1206 726.5,515 r0 top
R218 "Resistor" R_1206 676,510 r180 top
R219 "Resistor" R_1206 720,494 r90 top
R220 "Resistor" R_1206 726.5,510 r0 top
R221 "Resistor" R_1206 715,501.5 r90 top
R222 "Resistor" R_1206 726.5,505 r0 top
R223 "Resistor" R_1206 715,494 r90 top
R224 "Resistor" R_1206 726.5,500 r0 top
R225 "Resistor" R_1206 695,501 r90 top
R226 "Resistor" R_1206 676,515 r180 top
R227 "Resistor" R_1206 700,501 r90 top
R228 "Resistor" R_1206 705,501 r90 top
R229 "Resistor" R_1206 721,507.5 r180 top
R230 "Resistor" R_1206 721,522.5 r0 top
R231 "Resistor" R_1206 646,510 r180 top
R232 "Resistor" R_1206 675,494 r270 top
R233 "Resistor" R_1206 690,501 r270 top
R234 "Resistor" R_1206 721,517.5 r180 top
R235 "Resistor" R_1206 721,512.5 r0 top
R236 "Resistor" R_1206 710,494 r90 top
R237 "Resistor" R_1206 705,494 r270 top
R238 "Resistor" R_1206 665,506 r270 top
R239 "Resistor" R_1206 646,515 r0 top
RX_CLK+ "InputArrow" ARROW 690,692.5 r90 top
RX_CLK- "InputArrow" ARROW 687.5,692.5 r90 top
RX_D0+ "InputArrow" ARROW 695,692.5 r90 top
RX_D0- "InputArrow" ARROW 692.5,692.5 r90 top
RX_D1+ "InputArrow" ARROW 700,692.5 r0 top
RX_D1- "InputArrow" ARROW 697.5,692.5 r90 top
RX_D2+ "InputArrow" ARROW 705,692.5 r90 top
RX_D2- "InputArrow" ARROW 702.5,692.5 r90 top
VD1 "DiodeSchottky" zener_diode 617.5,641 r90 top
VD2 "DiodeSchottky" zener_diode 612.5,641 r90 top
VD3 "BAV99" BAV99 574.25,664.5 r0 top
VD4 "DiodeSchottky" zener_diode 622.5,641 r90 top
VD5 "DiodeSchottky" zener_diode 640,715.9 r270 top
VD6 "BAV99" BAV99 574.25,672 r0 top
VD7 "DiodeSchottky" zener_diode 645,716 r90 top
VD8 "BAV99" BAV99 574.25,679.5 r0 top
VD9 "Diode" zener_diode 650,715.9 r270 top
VD10 "Diode" zener_diode 655,715.9 r270 top
VD11 "DiodeSchottky" zener_diode 660,716 r90 top
VD12 "DiodeSchottky" zener_diode 688,703.4 r270 top
VD13 "DiodeSchottky" zener_diode 683,703.4 r270 top
VD14 "DiodeSchottky" zener_diode 678,703.4 r270 top
VD15 "Diode" zener_diode 673,703.5 r90 top
VD16 "Diode" zener_diode 668,703.5 r90 top
VD17 "Diode" zener_diode 645.9,500 r180 top
VT1 "MMBT3904L" MMBT3904L 712,511.25 r0 top
VT2 "2N3906" 2N3906 640,513.6 r180 top
VT3 "MMBT3904L" MMBT3904L 680,502.5 r180 top
VT4 "2N3906" 2N3906 672.5,503.6 r0 top
X1 "FI-SE30P-HF" FI-SE30P-HF_v2 727.5,565 r270 top
X2 "DB-15" VGA 563,672.5 r270 top
ZBOAS1082684350 "Слой маркировки" "BOASVIEWlayer:Top Overlay:1:1:33:101" 275,2142.5 r0 top (schematic designator fewf)
ZQ1 "Crystal" crystal 655,529.94 r90 top

## Footprints (in the part's own frame and the unit in brackets; to place one, negate y for a bottom-side part, rotate by r counter-clockwise, add the part's x,y. Pads: shape width x height; smd on the part's side, far side on the other; paste and mask are expansions set on the pad)
2N3906 [mm]
  round 1 hole 0.6: 1(0,1.4) 2(0,0) 3(0,-1.4)
  silkscreen extent -2,-2.57 2.66,2.75
24Cxx [mm]
  rect 1x1 hole 0.6: 1(0,0)
  round 1 hole 0.6: 2(0,-2.54) 3(0,-5.08) 4(0,-7.62) 5(7.62,-7.62) 6(7.62,-5.08) 7(7.62,-2.54) 8(7.62,0)
  silkscreen extent 1.03,-8.89 6.58,1.27
74AHC1G14(SOT25) [mm]
  rect 0.6x0.5 smd: 1(0,0) 2(0,-0.95) 3(0,-1.9) 4(3,-1.9) 5(3,0)
  silkscreen extent 0.75,-2.37 2.25,0.47
74LCX125(page12) [mm]
  rect 2x0.7 smd: 1(0,0) 2(0,-1.27) 3(0,-2.54) 4(0,-3.81) 5(0,-5.08) 6(0,-6.35) 7(0,-7.62) 8(5.6,-7.62) 9(5.6,-6.35) 10(5.6,-5.08) 11(5.6,-3.81) 12(5.6,-2.54) 13(5.6,-1.27) 14(5.6,0)
  silkscreen extent 2.08,-8.26 3.52,0.64
74LV4053(SOT38-4) [mm]
  rect 1x1 hole 0.6: 1(0,0)
  round 1 hole 0.6: 2(0,-2.54) 3(0,-5.08) 4(0,-7.62) 5(0,-10.16) 6(0,-12.7) 7(0,-15.24) 8(0,-17.78) 9(7.62,-17.78) 10(7.62,-15.24) 11(7.62,-12.7) 12(7.62,-10.16) 13(7.62,-7.62) 14(7.62,-5.08) 15(7.62,-2.54) 16(7.62,0)
  silkscreen extent 1.22,-19.05 6.41,1.27
74LVX14(SO-14) [mm]
  rect 2x0.7 smd: 1(-0.085,0) 2(-0.085,-1.27) 3(-0.085,-2.54) 4(-0.085,-3.81) 5(-0.085,-5.08) 6(-0.085,-6.35) 7(-0.085,-7.62) 8(6.115,-7.62) 9(6.115,-6.35) 10(6.115,-5.08) 11(6.115,-3.81) 12(6.115,-2.54) 13(6.115,-1.27) 14(6.115,0)
  silkscreen extent 2,-8.26 4.03,0.64
AIC1732(SOT-89) [mm]
  rect 2x0.7 smd: 1(-2.675,1.5) 2(-2.675,0) 3(-2.675,-1.5) 4(2.25,0)
  silkscreen extent -0.91,-2.25 0.66,2.25
ARROW [mm]
  round 1 hole 0.6: 1(0,0)
AV9173-01(DIP8) [mm]
  rect 1x1 hole 0.6: 1(0,0)
  round 1 hole 0.6: 2(0,-2.54) 3(0,-5.08) 4(0,-7.62) 5(7.62,-7.62) 6(7.62,-5.08) 7(7.62,-2.54) 8(7.62,0)
  silkscreen extent 1.43,-8.89 6.18,1.27
BAV99 [mm]
  rect 0.5x0.6 smd: 1(-1.4,1) 2(-1.4,-1) 3(1.25,0)
  silkscreen extent -0.5,-1.5 0.5,1.5
"BOASVIEWlayer:Top Overlay:1:1:33:101" [mm]
cap_electro_13 [mm]
  round 1 hole 0.6: 1(-1.5,0) 2(1.5,0)
  silkscreen extent -2.7,-2.7 2.7,2.7
Cap_tantal_D [mm]
  rect 1.3x2.4 smd: 1(2.5,0) 2(-2.5,0)
  silkscreen extent -3.5,-1.7 3.5,1.7
crystal [mm]
  round 1 hole 0.6: 1(-2.44,0) 2(2.44,0)
  silkscreen extent -5.8,-2.6 5.8,2.6
FI-SE30P-HF_v2 [mm]
  rect 1.2x1.2 hole 0.8: 1(0,0)
  round 1.2 hole 0.8: 2(0,-2.5) 3(0,-5) 4(0,-7.5) 5(0,-10) 6(0,-12.5) 7(0,-15) 8(0,-17.5) 9(0,-20) 10(0,-22.5) 11(0,-25) 12(0,-27.5) 13(0,-30) 14(0,-32.5) 15(0,-35) 16(0,-37.5) 17(0,-40) 18(0,-42.5) 19(0,-45) 20(0,-47.5) 21(0,-50) 22(0,-52.5) 23(0,-55) 24(0,-57.5) 25(0,-60) 26(0,-62.5) 27(0,-65) 28(0,-67.5) 29(0,-70) 30(0,-72.5)
  silkscreen extent -2.25,-73.75 2.25,1.25
inductor [mm]
  rect 2.5x4.5 smd: 1(-3,0) 2(3,0)
  silkscreen extent -5,-3 5,3.25
MMBT3904L [mm]
  rect 0.9x0.8 smd: 1(-1.25,0) 2(-1.25,-2.5) 3(3,-1.25)
  silkscreen extent -0.19,-3.25 2.08,0.65
R_1206 [mm]
  rect 1x1.6 smd: 1(-1.5,0) 2(1.5,0)
  silkscreen extent -2.25,-1.1 2.25,1.1
SD1210 [mm]
  rect 2x0.35 smd: 1(0,0) 2(0,-0.65) 3(0,-1.3) 4(0,-1.95) 5(0,-2.6) 6(0,-3.25) 7(0,-3.9) 8(0,-4.55) 9(0,-5.2) 10(0,-5.85) 11(0,-6.5) 12(0,-7.15) 13(0,-7.8) 14(0,-8.45) 15(0,-9.1) 16(0,-9.75) 17(0,-10.4) 18(0,-11.05) 19(0,-11.7) 20(0,-12.35) 21(0,-13) 22(0,-13.65) 23(0,-14.3) 24(0,-14.95) 25(0,-15.6) 26(0,-16.25) 27(0,-16.9) 28(0,-17.55) 29(0,-18.2) 30(0,-18.85) 31(0,-19.5) 32(0,-20.15) 33(0,-20.8) 34(0,-21.45) 35(0,-22.1) 36(0,-22.75) 37(0,-23.4) 38(0,-24.05) 39(0,-24.7) 40(0,-25.35) 81(34.45,-25.6) 82(34.45,-24.95) 83(34.45,-24.3) 84(34.45,-23.65) 85(34.45,-23) 86(34.45,-22.35) 87(34.45,-21.7) 88(34.45,-21.05) 89(34.45,-20.4) 90(34.45,-19.75) 91(34.45,-19.1) 92(34.45,-18.45) 93(34.45,-17.8) 94(34.45,-17.15) 95(34.45,-16.5) 96(34.45,-15.85) 97(34.45,-15.2) 98(34.45,-14.55) 99(34.45,-13.9) 100(34.45,-13.25) 101(34.45,-12.6) 102(34.45,-11.95) 103(34.45,-11.3) 104(34.45,-10.65) 105(34.45,-10) 106(34.45,-9.35) 107(34.45,-8.7) 108(34.45,-8.05) 109(34.45,-7.4) 110(34.45,-6.75) 111(34.45,-6.1) 112(34.45,-5.45) 113(34.45,-4.8) 114(34.45,-4.15) 115(34.45,-3.5) 116(34.45,-2.85) 117(34.45,-2.2) 118(34.45,-1.55) 119(34.45,-0.9) 120(34.45,-0.25)
  rect 0.35x2 smd: 41(4.55,-30.15) 42(5.2,-30.15) 43(5.85,-30.15) 44(6.5,-30.15) 45(7.15,-30.15) 46(7.8,-30.15) 47(8.45,-30.15) 48(9.1,-30.15) 49(9.75,-30.15) 50(10.4,-30.15) 51(11.05,-30.15) 52(11.7,-30.15) 53(12.35,-30.15) 54(13,-30.15) 55(13.65,-30.15) 56(14.3,-30.15) 57(14.95,-30.15) 58(15.6,-30.15) 59(16.25,-30.15) 60(16.9,-30.15) 61(17.55,-30.15) 62(18.2,-30.15) 63(18.85,-30.15) 64(19.5,-30.15) 65(20.15,-30.15) 66(20.8,-30.15) 67(21.45,-30.15) 68(22.1,-30.15) 69(22.75,-30.15) 70(23.4,-30.15) 71(24.05,-30.15) 72(24.7,-30.15) 73(25.35,-30.15) 74(26,-30.15) 75(26.65,-30.15) 76(27.3,-30.15) 77(27.95,-30.15) 78(28.6,-30.15) 79(29.25,-30.15) 80(29.9,-30.15) 121(29.9,4.3) 122(29.25,4.3) 123(28.6,4.3) 124(27.95,4.3) 125(27.3,4.3) 126(26.65,4.3) 127(26,4.3) 128(25.35,4.3) 129(24.7,4.3) 130(24.05,4.3) 131(23.4,4.3) 132(22.75,4.3) 133(22.1,4.3) 134(21.45,4.3) 135(20.8,4.3) 136(20.15,4.3) 137(19.5,4.3) 138(18.85,4.3) 139(18.2,4.3) 140(17.55,4.3) 141(16.9,4.3) 142(16.25,4.3) 143(15.6,4.3) 144(14.95,4.3) 145(14.3,4.3) 146(13.65,4.3) 147(13,4.3) 148(12.35,4.3) 149(11.7,4.3) 150(11.05,4.3) 151(10.4,4.3) 152(9.75,4.3) 153(9.1,4.3) 154(8.45,4.3) 155(7.8,4.3) 156(7.15,4.3) 157(6.5,4.3) 158(5.85,4.3) 159(5.2,4.3) 160(4.55,4.3)
  silkscreen extent 1.68,-28.47 32.76,2.62
SIL151 [mm]
  rect 2x0.35 smd: 1(0,0) 2(0,0.65) 3(0,1.3) 4(0,1.95) 5(0,2.6) 6(0,3.25) 7(0,3.9) 8(0,4.55) 9(0,5.2) 10(0,5.85) 11(0,6.5) 12(0,7.15) 13(0,7.8) 14(0,8.45) 15(0,9.1) 16(0,9.75) 17(0,10.4) 18(0,11.05) 19(0,11.7) 20(0,12.35) 21(0,13) 22(0,13.65) 23(0,14.3) 24(0,14.95) 25(0,15.6) 51(-24.7,15.6) 52(-24.7,14.95) 53(-24.7,14.3) 54(-24.7,13.65) 55(-24.7,13) 56(-24.7,12.35) 57(-24.7,11.7) 58(-24.7,11.05) 59(-24.7,10.4) 60(-24.7,9.75) 61(-24.7,9.1) 62(-24.7,8.45) 63(-24.7,7.8) 64(-24.7,7.15) 65(-24.7,6.5) 66(-24.7,5.85) 67(-24.7,5.2) 68(-24.7,4.55) 69(-24.7,3.9) 70(-24.7,3.25) 71(-24.7,2.6) 72(-24.7,1.95) 73(-24.7,1.3) 74(-24.7,0.65) 75(-24.7,0)
  rect 0.35x2 smd: 26(-4.55,20.15) 27(-5.2,20.15) 28(-5.85,20.15) 29(-6.5,20.15) 30(-7.15,20.15) 31(-7.8,20.15) 32(-8.45,20.15) 33(-9.1,20.15) 34(-9.75,20.15) 35(-10.4,20.15) 36(-11.05,20.15) 37(-11.7,20.15) 38(-12.35,20.15) 39(-13,20.15) 40(-13.65,20.15) 41(-14.3,20.15) 42(-14.95,20.15) 43(-15.6,20.15) 44(-16.25,20.15) 45(-16.9,20.15) 46(-17.55,20.15) 47(-18.2,20.15) 48(-18.85,20.15) 49(-19.5,20.15) 50(-20.15,20.15) 76(-20.15,-4.55) 77(-19.5,-4.55) 78(-18.85,-4.55) 79(-18.2,-4.55) 80(-17.55,-4.55) 81(-16.9,-4.55) 82(-16.25,-4.55) 83(-15.6,-4.55) 84(-14.95,-4.55) 85(-14.3,-4.55) 86(-13.65,-4.55) 87(-13,-4.55) 88(-12.35,-4.55) 89(-11.7,-4.55) 90(-11.05,-4.55) 91(-10.4,-4.55) 92(-9.75,-4.55) 93(-9.1,-4.55) 94(-8.45,-4.55) 95(-7.8,-4.55) 96(-7.15,-4.55) 97(-6.5,-4.55) 98(-5.85,-4.55) 99(-5.2,-4.55) 100(-4.55,-4.55)
  silkscreen extent -23.02,-2.86 -1.69,18.47
SM0230 [mm]
  rect 2x0.35 smd: 1(0.75,0) 2(0.75,0.65) 3(0.75,1.3) 4(0.75,1.95) 5(0.75,2.6) 6(0.75,3.25) 7(0.75,3.9) 8(0.75,4.55) 9(0.75,5.2) 10(0.75,5.85) 21(-14.2,5.85) 22(-14.2,5.2) 23(-14.2,4.55) 24(-14.2,3.9) 25(-14.2,3.25) 26(-14.2,2.6) 27(-14.2,1.95) 28(-14.2,1.3) 29(-14.2,0.65) 30(-14.2,0)
  rect 0.35x2 smd: 11(-3.8,10.4) 12(-4.45,10.4) 13(-5.1,10.4) 14(-5.75,10.4) 15(-6.4,10.4) 16(-7.05,10.4) 17(-7.7,10.4) 18(-8.35,10.4) 19(-9,10.4) 20(-9.65,10.4) 31(-9.65,-4.55) 32(-9,-4.55) 33(-8.35,-4.55) 34(-7.7,-4.55) 35(-7.05,-4.55) 36(-6.4,-4.55) 37(-5.75,-4.55) 38(-5.1,-4.55) 39(-4.45,-4.55) 40(-3.8,-4.55)
  silkscreen extent -12.51,-2.86 -0.93,8.72
SN75LVDS83_v2 [mm]
  rect 1x1 hole 0.6: 1(0,0)
  round 1 hole 0.6: 2(0,-2.5) 3(0,-5) 4(0,-7.5) 5(0,-10) 6(0,-12.5) 7(0,-15) 8(0,-17.5) 9(0,-20) 10(0,-22.5) 11(0,-25) 12(0,-27.5) 13(0,-30) 14(0,-32.5) 15(0,-35) 16(0,-37.5) 17(0,-40) 18(0,-42.5) 19(0,-45) 20(0,-47.5) 21(0,-50) 22(0,-52.5) 23(0,-55) 24(0,-57.5) 25(0,-60) 26(0,-62.5) 27(0,-65) 28(0,-67.5) 29(15.2,-67.5) 30(15.2,-65) 31(15.2,-62.5) 32(15.2,-60) 33(15.2,-57.5) 34(15.2,-55) 35(15.2,-52.5) 36(15.2,-50) 37(15.2,-47.5) 38(15.2,-45) 39(15.2,-42.5) 40(15.2,-40) 41(15.2,-37.5) 42(15.2,-35) 43(15.2,-32.5) 44(15.2,-30) 45(15.2,-27.5) 46(15.2,-25) 47(15.2,-22.5) 48(15.2,-20) 49(15.2,-17.5) 50(15.2,-15) 51(15.2,-12.5) 52(15.2,-10) 53(15.2,-7.5) 54(15.2,-5) 55(15.2,-2.5) 56(15.2,0)
  silkscreen extent 2.08,-68.75 13.11,1.25
ST_80_2_ADI [mil]
  rect 57.56x16.97 smd paste+0 mask+0: 1(-304,243.11) 2(-304,217.52) 3(-304,191.93) 4(-304,166.34) 5(-304,140.75) 6(-304,115.16) 7(-304,89.57) 8(-304,63.98) 9(-304,38.39) 10(-304,12.8) 11(-304,-12.8) 12(-304,-38.39) 13(-304,-63.98) 14(-304,-89.57) 15(-304,-115.16) 16(-304,-140.75) 17(-304,-166.34) 18(-304,-191.93) 19(-304,-217.52) 20(-304,-243.11) 41(304,-243.11) 42(304,-217.52) 43(304,-191.93) 44(304,-166.34) 45(304,-140.75) 46(304,-115.16) 47(304,-89.57) 48(304,-63.98) 49(304,-38.39) 50(304,-12.8) 51(304,12.8) 52(304,38.39) 53(304,63.98) 54(304,89.57) 55(304,115.16) 56(304,140.75) 57(304,166.34) 58(304,191.93) 59(304,217.52) 60(304,243.11)
  rect 16.97x57.56 smd paste+0 mask+0: 21(-243.11,-304) 22(-217.52,-304) 23(-191.93,-304) 24(-166.34,-304) 25(-140.75,-304) 26(-115.16,-304) 27(-89.57,-304) 28(-63.98,-304) 29(-38.39,-304) 30(-12.8,-304) 31(12.79,-304) 32(38.38,-304) 33(63.98,-304) 34(89.57,-304) 35(115.16,-304) 36(140.75,-304) 37(166.34,-304) 38(191.93,-304) 39(217.52,-304) 40(243.11,-304) 61(243.11,304) 62(217.52,304) 63(191.93,304) 64(166.34,304) 65(140.75,304) 66(115.16,304) 67(89.57,304) 68(63.98,304) 69(38.38,304) 70(12.79,304) 71(-12.8,304) 72(-38.39,304) 73(-63.98,304) 74(-89.57,304) 75(-115.16,304) 76(-140.75,304) 77(-166.34,304) 78(-191.93,304) 79(-217.52,304) 80(-243.11,304)
  silkscreen extent -353,-353 353,353
VGA [mm]
  round 1.2 hole 0.7: 1(-5,2) 2(-3,2) 3(-1,2) 4(1,2) 5(3,2) 6(-4,0) 7(-2,0) 8(0,0) 9(2,0) 10(4,0) 11(-5,-2) 12(-3,-2) 13(-1,-2) 14(1,-2) 15(3,-2)
  round 2.5 hole 2: 16(8,0) 17(-9,0)
  silkscreen extent -11,-7 10,4
zener_diode [mm]
  rect 0.4x0.7 smd: 1(-1.6,0) 2(1.5,0)
  silkscreen extent -2,-0.9 1.9,0.9

## Part data
DD10: library part 74AHC1G14-TA
X2: library part VGA_connector
DD4: Built_By=EMA_UL_Team, Copyright="Copyright (C) 2018 Accelerated Designs. All rights reserved", Manufacturer_Part_Number=AD9883ABSTZ-140, RefDes=RefDes, SourceLibrary=Analog_2012-01-01_6, Type=DEV, Vendor="Analog Devices Inc"

## Free pads (board coordinates)
  round 4 hole 4 unplated: 1(557.5,490) 1(557.5,720) 1(735,490) ""(735,720)

## Via types
v1: diameter 0.6, hole 0.4, Top Layer to Bottom Layer, 677 vias
v2: diameter 0.5, hole 0.4, Top Layer to Bottom Layer, 3 vias
v3: diameter 0.4, hole 0.4, Top Layer to Bottom Layer, 2 vias
v4: diameter 0.6, hole 0.3, Top Layer to Bottom Layer, 1 vias

## Nets (pads, with @x,y where several pads share a name; then routed paths per layer and width w, separated by ;. In a path a pad name is that pad's centre, name@x,y a point inside that pad or via, vN(x,y) a via of type N, cw(c..) or ccw(c..) an arc to the next point about the centre after c; other vN are vias at no path point)
3_3Va: L13.1 L14.1 L15.1 L18.1 | length 47.6
  Top Layer w0.4: L18.1@703,715 704.774,715 706.435,716.661 721.868,716.661 722.605,715.924 722.605,709.279 722.884,709 L15.1@725.5,709 725.5,705.478 727.5,703.478 L14.1@727.5,700 L13.1@727.5,692.5
3V3: C62.2 C171.1 DD1.14 DD8.8 DD15.14 DD17.2 DD17.8 L1.2 L7.2 L12.2 R110.1 R111.1 R181.2 R182.2 R187.2 R188.2 R202.2 R203.2 R210.1 R211.1 R212.1 R213.1 R214.1 R215.1 R216.1 R217.1 R219.1 R220.1 R221.1 R222.1 R223.1 R224.1 R225.1 R226.2 R227.1 R228.1 R229.1 R230.1 R238.2 R239.2 VT2.2 VT4.2 | length 690
  Top Layer w0.4: L7.2@567.5,710 570.161,707.339 577.339,707.339 L1.2@580,710 v1(580,702.818) ; DD8.8@572.38,555.12 572.38,559.356 573.024,560 R111.1@575,560 578.104,560 578.642,560.538 578.642,578.591 579.204,579.153 584.433,579.153 585.038,579.758 585.038,588.89 585.183,589.034 585.183,597.877 587,599.694 R110.1@587,600 586.434,600 584.048,602.386 581.152,602.386 580.593,602.945 580.593,606.044 577.469,609.168 577.469,625.907 580.644,629.082 L12.2@580.644,632.5 ; L12.2@582.5,632.5 L12.2@580.644,632.5 ; v1(584.175,702.818) 584.175,691.185 585.572,689.788 585.572,678.256 584.505,677.189 584.505,651.739 583.184,650.418 581.478,650.418 581.3,650.24 581.3,641.606 579.85,640.156 579.85,636.854 580.136,636.568 580.136,632.5 L12.2@580.644,632.5 ; v1(612.572,696.443) 614.172,696.443 615.08,695.535 DD1.14@615.08,693.8 ; VT2.2@640,513.6 647.192,513.6 647.5,513.908 R239.2@647.5,514.248 ; R239.2@647.5,515 R239.2@647.5,514.248 ; DD15.14@647.5,527.5 649.92,527.5 DD17.2@659.88,517.54 657.327,514.987 657.327,510.318 656.05,509.041 653.796,509.041 653.009,509.829 653.009,513.588 652.348,514.248 R239.2@647.5,514.248 ; C171.1@661.5,502.5 663.5,504.5 R238.2@665,504.5 671.6,504.5 ; DD17.8@667.5,520.08 670.941,520.08 671.021,520 R181.2@674.5,520 ; VT4.2@672.5,503.6 671.6,504.5 ; v1(677.418,533.603) 674.5,530.685 R182.2@674.5,525 R181.2@674.5,520 ; R214.1@682,510 682,509.041 682.752,508.289 682.752,504.266 681.914,503.428 680.644,503.428 680.39,503.174 680.39,500.338 681.228,499.5 681.736,499.5 ; v1(682.5,533.603) R187.2@682.5,535.5 R188.2@687.5,535.5 R202.2@692.5,535.5 R203.2@697.5,535.5 ; R211.1@685,499.5 681.736,499.5 ; R225.1@695,499.5 R227.1@700,499.5 701.684,499.5 702.163,499.979 703.671,499.979 704.15,499.5 R228.1@704.402,499.5 ; R228.1@705,499.5 R228.1@704.402,499.5 ; R221.1@715,500 716.204,498.796 716.204,493.704 R223.1@715,492.5 R223.1@715.01,492.5 ; R230.1@719.5,522.5 719.5,522.752 719.925,523.177 720.718,523.177 721.657,524.116 725,524.116 ; v1(721.36,495.503) 721.36,493.008 720.852,492.5 ; R229.1@722.5,507.5 722.5,507.522 724.978,510 R220.1@725,510 ; v1(724.052,500.05) R224.1@725,500.05 ; R216.1@725,492.5 720.852,492.5 ; R224.1@725,500 R224.1@725,500.05 ; R210.1@725,530 R213.1@725,525 725,524.116 ; 671.525,504.575 671.525,505.46 672.033,505.968 673.075,505.968 674.726,504.318 674.726,497.916 678.18,494.462 678.18,493.008 678.688,492.5 R212.1@679.983,492.5 ; 671.525,504.575 671.6,504.5 ; 671.525,504.575 666.142,509.958 666.142,513.464 666.496,513.818 674.222,513.818 674.5,514.096 R226.2@674.5,515 R181.2@674.5,520 ; R212.1@679.983,492.5 R212.1@680,492.5 680.568,492.5 682.568,490.499 ; R212.1@679.983,492.5 679.983,493.37 681.203,494.589 681.203,498.967 681.736,499.5 ; 682.568,490.499 701.218,490.499 701.954,491.236 701.954,497.053 R228.1@704.402,499.5 ; 682.568,490.499 684.397,488.671 714.477,488.671 715.01,489.204 R223.1@715.01,492.5 ; R223.1@715.01,492.5 R219.1@720,492.5 720.852,492.5 ; R224.1@725,500.05 R222.1@725,505 R220.1@725,510 ; R220.1@725,510 R217.1@725,515 R215.1@725,520 725,524.116
  Bottom Layer w0.4: DD8.8@572.38,555.12 566.142,548.882 566.142,545.858 C62.2@567.5,544.5 560.375,537.375 560.375,519.684 561.188,518.871 584.683,518.871 589.954,513.6 VT2.2@640,513.6 ; v1(580,702.818) v1(584.175,702.818) 606.196,702.818 v1(612.572,696.443) ; DD17.2@659.88,517.54 662.42,520.08 DD17.8@667.5,520.08 ; v1(677.418,533.603) v1(682.5,533.603) ; v1(721.36,495.503) 720.598,496.265 720.598,496.595 v1(724.052,500.05)
3V3b: C134.1 L19.1 L21.1 L22.1 L23.1 | length 80.6
  Top Layer w0.4: L19.1@687.5,625 L21.1@696.9,625 ; L21.1@697.5,625 L21.1@696.9,625 ; C134.1@707.5,620 707.5,619.989 709.676,619.989 710.184,620.497 710.184,630.746 709.93,631 ; L23.1@717.5,631 709.93,631 ; L21.1@696.9,625 696.9,622.647 696.646,608.076 697.154,607.568 697.763,607.568 698.271,608.076 698.271,619.277 704.672,625.678 704.672,630.428 705.244,631 L22.1@707.5,631 709.93,631
3V3LVDSA: C136.1 C139.2 C142.2 C145.2 C148.2 DD13.44 DD14.44 L22.2 | length 163.1
  Top Layer w0.4: DD13.44@690,557.5 691.185,558.685 ; v1(691.185,563.347) 691.185,558.685 ; v1(691.794,579.044) 691.058,578.307 691.155,563.346 691.185,558.685 ; C148.2@703,580 C145.2@703,587.5 C142.2@703,595 C139.2@703,602.5 705.206,604.706 705.206,610.709 707.5,613.004 C136.1@707.5,615 707.5,616.89 706.323,618.067 706.323,621.894 707.5,623.07 L22.2@707.5,625
  Bottom Layer w0.4: DD14.44@617.5,557.7 619.319,559.519 628.576,559.519 629.303,558.792 634.652,558.792 635.572,559.712 687.55,559.712 v1(691.185,563.347) ; v1(691.794,579.044) 702.044,579.044 C148.2@703,580
3V3LVDSD: C135.1 C138.2 C141.2 C144.2 C147.2 C150.2 C151.2 C152.2 C153.2 C154.2 C155.2 C156.2 C157.2 DD13.1 DD13.9 DD13.26 DD14.1 DD14.9 DD14.26 L21.2 R177.2 R179.2 | length 352.4
  Top Layer w0.4: R177.2@580,539.5 580.288,539.5 v1(580.288,538.175) ; v1(693.09,624.18) 693.09,619.91 C138.2@695.5,617.5 C141.2@695.5,610 C144.2@695.5,602.5 C147.2@695.5,595 C150.2@695.5,587.5 C151.2@695.5,580 C152.2@695.5,572.5 ; v1(696.163,627.253) 697.5,628.59 L21.2@697.5,631 ; R179.2@717.5,610 715.493,610 714.47,611.022 710.489,611.022 709.466,610 C135.1@707.5,610 707.5,610.514 714.282,617.296 717.499,617.296 718.083,616.712 718.083,613.41 719.372,612.121 719.372,605.796 719.811,605.358 719.811,602.983 719.328,602.5 C156.2@718.5,602.5 C157.2@718.5,595 C153.2@718.5,587.5 C154.2@718.5,580 C155.2@718.5,572.5 721.258,569.742 721.258,543.542 DD13.26@722.5,542.3
  Bottom Layer w0.4: v1(580.288,538.175) 583.175,538.175 DD14.1@587.5,542.5 588.472,541.528 598.246,541.528 598.754,542.036 598.754,543.175 599.034,543.454 600.456,543.454 601.472,542.438 601.472,541.426 601.98,540.918 605.918,540.918 DD14.9@607.5,542.5 613.527,536.473 643.973,536.473 DD14.26@650,542.5 654.934,537.566 655.266,537.566 DD13.1@660,542.3 661.358,540.942 678.642,540.942 DD13.9@680,542.3 680.975,541.325 697.992,541.325 698.627,541.96 698.627,542.544 699.44,543.357 703.072,543.357 703.605,542.823 703.605,541.02 704.164,540.461 720.661,540.461 DD13.26@722.5,542.3 ; v1(693.09,624.18) v1(696.163,627.253) ; C150.2@695.5,587.5 696.467,588.467 717.533,588.467 C153.2@718.5,587.5
3V3LVDSP: C137.1 C140.2 C143.2 C146.2 C149.2 DD13.34 DD14.34 L23.2 | length 178.1
  Top Layer w0.4: C149.2@703,572.5 708.762,566.738 708.762,563.738 DD13.34@715,557.5 ; C137.1@715,620 715,621.233 717.5,623.733 L23.2@717.5,625 722.224,625 724.484,622.739 724.484,589.016 C146.2@726,587.5 C143.2@726,580 C140.2@726,572.5
  Bottom Layer w0.4: DD14.34@642.5,557.7 643.858,559.058 651.969,559.058 652.023,559.003 713.497,559.003 DD13.34@715,557.5 721.436,563.936 721.436,567.936 C140.2@726,572.5